# Altium PCB Design1.PcbDoc
Units mm, origin at the board's own origin, x right, y up, seen from the top; angles counter-clockwise.
Board outline 68.6 x 53.4 mm, 2 copper layers (Top Layer, Bottom Layer), stack 1.671 mm thick; 7 components, 14 nets, 82 pads, 0 vias.
Unrouted connection lines stored in the file: 48.
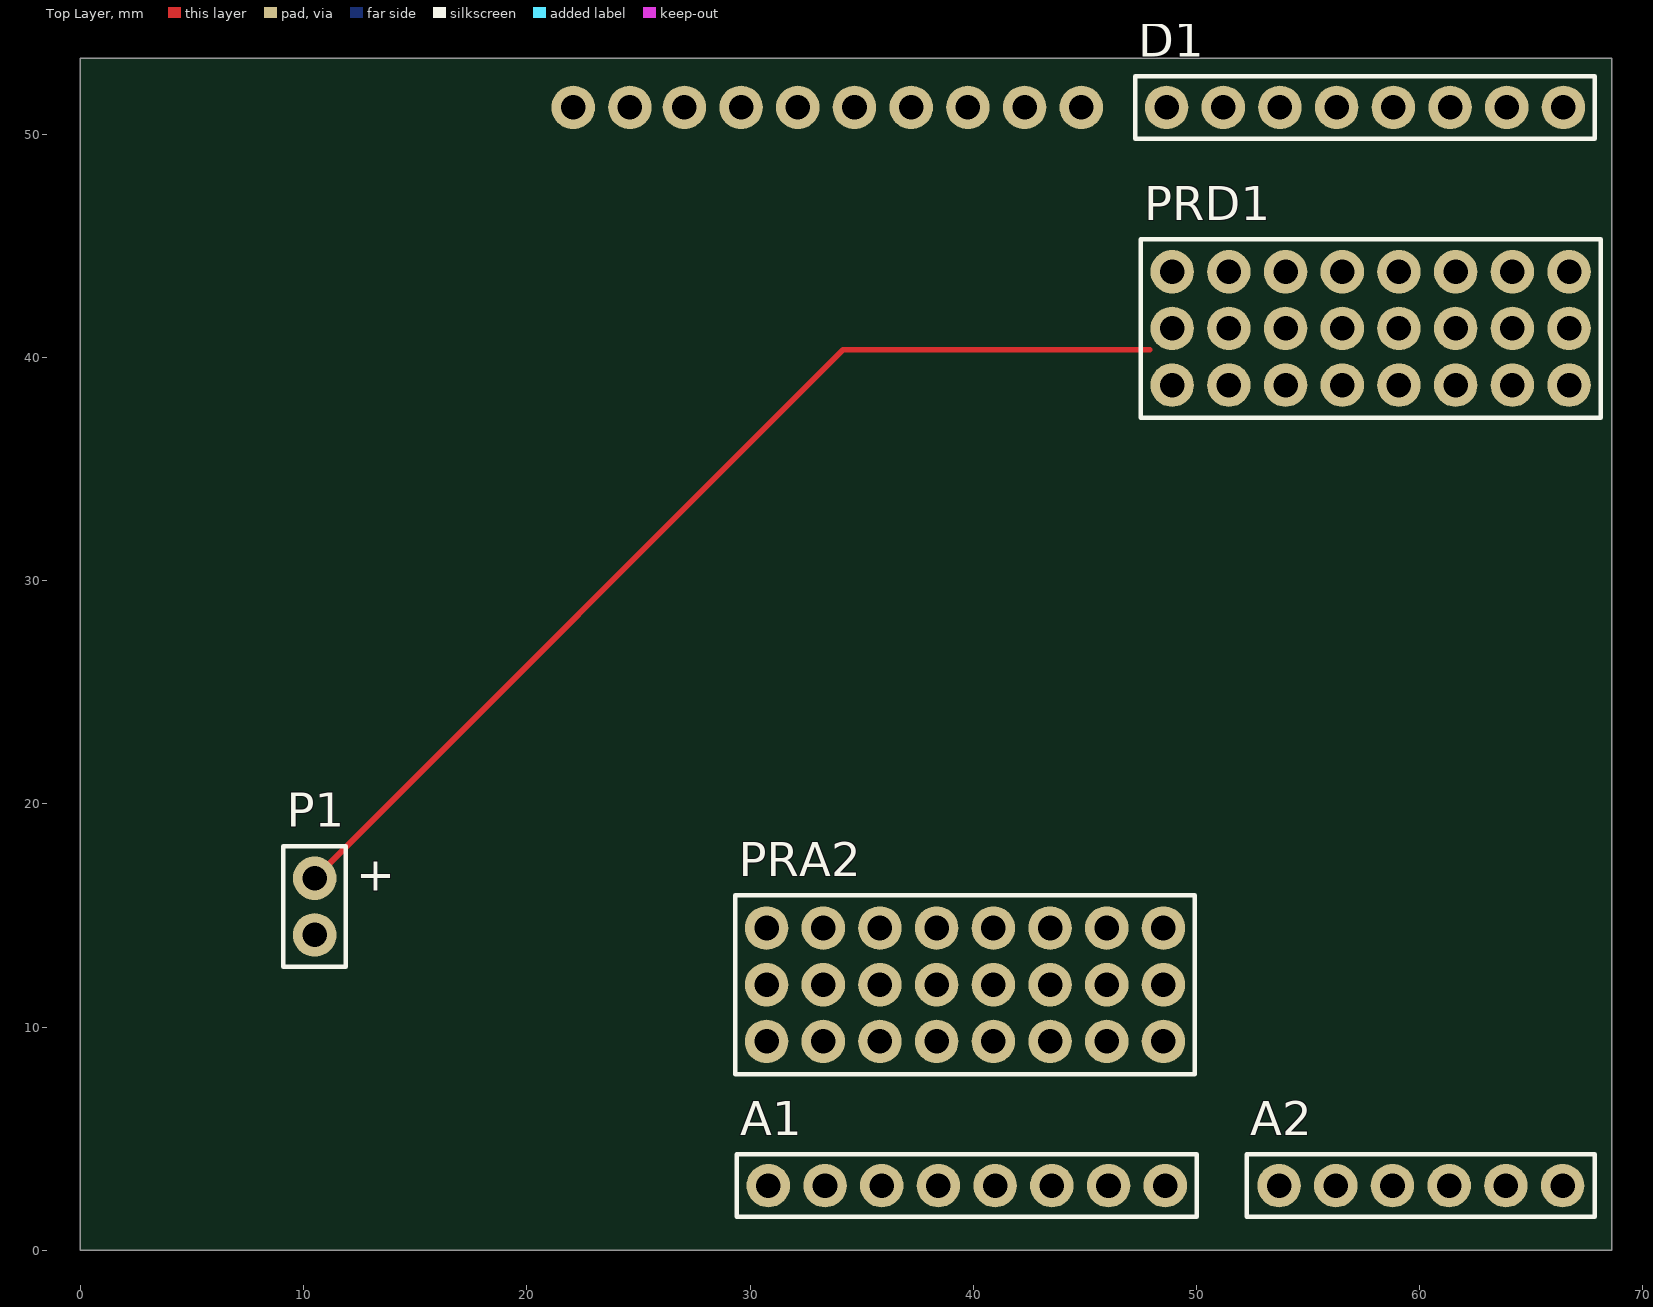
[diagram p0: Top Layer view]
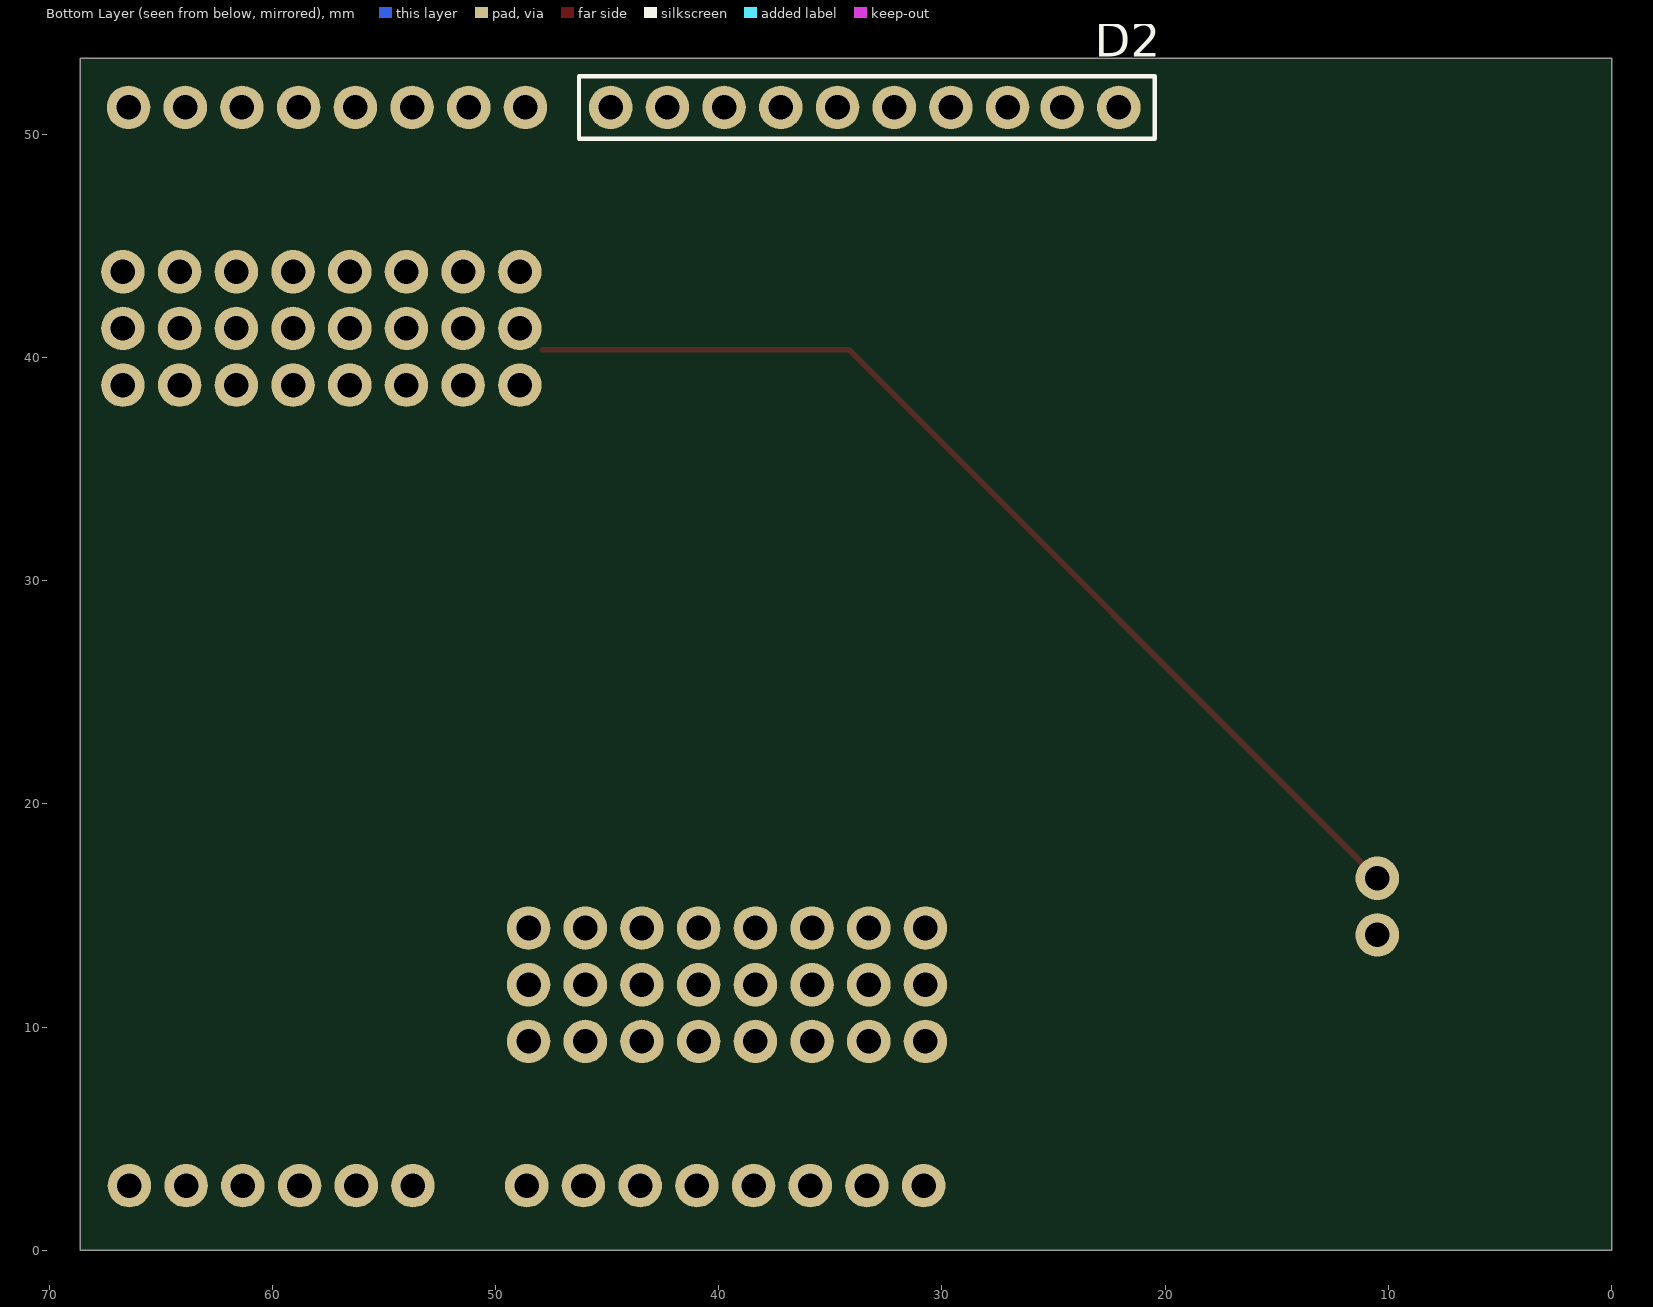
[diagram p1: Bottom Layer view, seen from below]

## Layer stack, top to bottom
Top Solder: solder mask 0.0102, Solder Resist, Dk 3.5
Top Layer: signal copper 0.0356
Dielectric 1: dielectric 1.6, FR-4, Dk 4.8
Bottom Layer: signal copper 0.0356
Bottom Solder: solder mask 0.0102, Solder Resist, Dk 3.5

## Board outline
0,0 68.6,0 68.6,53.4 0,53.4

## Design rules (kind name [scope] priority, off if disabled: settings)
Clearance [All] p1: gap=0.254 ignorepadtopadclearanceinfootprint=FALSE except(0: Arc-Hole Track-Hole SMDPad-Hole THPad-Hole Via-Hole Fill-Hole Poly-Hole Region-Hole Text-Hole)
PolygonConnect [All] p1: connectstyle=Relief reliefconductorwidth=0.254 reliefentries=4 polygonreliefangle="90 Angle" airgapwidth=0.254
RoutingVias [All] p1: holewidth=0.711 width=1.27 viastyle="Through Hole" minholewidth=0.711 minwidth=1.27 maxholewidth=0.711 maxwidth=1.27
SolderMaskExpansion [All] p1: expansion=0.102 istentingtop=FALSE
Width [All] p1: maxlimit=0.254 minlimit=0.254 preferedwidth=0.254
30 further rules are at their usual default settings.

## Components (designator, comment, footprint, x,y, rotation, side; value= is the part's Value field where it differs from the comment)
A1 "1x8 pins" "D0-7 - DUPLICATE1" 39.71,2.9 r90 top
A2 "1x6 pins" "PCBCOMPONENT_1 - DUPLICATE2" 60.05,2.9 r90 top
D1 "1X8 pins" "D0-7 - DUPLICATE1" 57.55,51.2 r270 top
D2 "1x10 pins" ? 33.46,51.2 r90 bottom
P1 "1x2 pins" "PCBCOMPONENT_1 - DUPLICATE" 10.5,15.4 r0 top
PRA2 "Pin row" PCBCOMPONENT_1 39.63,11.9 r90 top
PRD1 "Pin row" PCBCOMPONENT_1 57.8,41.3 r90 top

## Footprints (in the part's own frame and the unit in brackets; to place one, negate y for a bottom-side part, rotate by r counter-clockwise, add the part's x,y. Pads: shape width x height; smd on the part's side, far side on the other; paste and mask are expansions set on the pad)
"D0-7 - DUPLICATE1" [mm]
  round 1.95 hole 1.1: 0(0,8.89) 1(0,6.35) 2(0,3.81) 3(0,1.27) 4(0,-1.27) 5(0,-3.81) 6(0,-6.35) 7(0,-8.89)
  silkscreen extent -1.4,-10.3 1.4,10.3, body extent -1.27,-10.16 1.27,10.16, height 8.54
PCBCOMPONENT_1 [mm]
  round 1.95 hole 1.1: 0(-2.54,8.89) 0(0,8.89) 0(2.54,8.89) 1(-2.54,6.35) 1(0,6.35) 1(2.54,6.35) 2(-2.54,3.81) 2(0,3.81) 2(2.54,3.81) 3(-2.54,1.27) 3(0,1.27) 3(2.54,1.27) 4(-2.54,-1.27) 4(0,-1.27) 4(2.54,-1.27) 5(-2.54,-3.81) 5(0,-3.81) 5(2.54,-3.81) 6(-2.54,-6.35) 6(0,-6.35) 6(2.54,-6.35) 7(-2.54,-8.89) 7(0,-8.89) 7(2.54,-8.89)
  silkscreen extent -4,-10.3 4,10.3, body extent -3.81,-10.16 3.81,10.16, height 8.55
"PCBCOMPONENT_1 - DUPLICATE" [mm]
  round 1.95 hole 1.1: 1(0,1.27) 2(0,-1.27)
  silkscreen extent -1.4,-2.7 1.4,2.7, body extent -1.27,-2.54 1.27,2.54, height 8.55
"PCBCOMPONENT_1 - DUPLICATE2" [mm]
  round 1.95 hole 1.1: 0(0,6.35) 1(0,3.81) 2(0,1.27) 3(0,-1.27) 4(0,-3.81) 5(0,-6.35)
  silkscreen extent -1.4,-7.8 1.4,7.8, body extent -1.27,-7.62 1.27,7.62, height 8.55
? [mm]
  round 1.95 hole 1.1: 8(0,-11.38) 9(0,-8.84) 10(0,-6.4) 11(0,-3.86) 12(0,-1.32) 13(0,1.22) 14(0,3.76) 15(0,6.3) 16(0,8.84) 17(0,11.38)
  silkscreen extent -1.4,-13 1.4,12.8, body extent -1.27,-12.8 1.27,12.6, height 8.55

## Part data
A1: library part "61300811121 (2)", "Board-To-Board Connector, Vertical, Wr-Phd Series, Through Hole, Header, 8, 2.54 Mm", Color=Black, Manufacturer="Wurth Electronics", Manufacturer Part Number=61300811121, Supplier Part Number 1=732-5321-ND, Category=Connectors, ComponentLink1Description=http://www.farnell.com/cad/1737268.pdf?src-supplier=Element14, ComponentLink1URL=http://www.farnell.com/cad/1737268.pdf?src-supplier=Element14, ComponentLink2Description=https://katalog.we-online.de/em/datasheet/6130xx11121.pdf?src-supplier=Digi-Key, ComponentLink2URL=https://katalog.we-online.de/em/datasheet/6130xx11121.pdf?src-supplier=Digi-Key, Connector Type="Male Pin", Contact Material=Copper, Contact Mating Length=0.236inch, Contact Plating=Gold, Gender=Male, Mount="Through Hole", Number of Contacts=8, Number of Positions=8, Number of Rows=1, Packaging=Bulk, Pitch=0.1inch, Pricing 1="1=0.37000, 10=0.31500, 25=0.26320, 50=0.21900, 100=0.19900, 1000=0.18100 (USD)", REACH SVHC=Unknown, RoHS=Yes, RoHS Compliant=Yes, Stock 1=5407, Supplier 1=Digi-Key, Termination=Solder
A2: library part 61300611121, "WURTH ELEKTRONIK - 61300611121 - Pin Header, Board-to-Board, 2.54 mm, 1 Rows, 6 Contacts, Through Hole, WR-PHD Series", Color=Black, Current Rating=3A, Manufacturer="Wurth Electronics", Max Operating Temperature=125°C, Min Operating Temperature=-40°C, Supplier Part Number 1=732-5319-ND, Voltage Rating=250V, Category=Connectors, ComponentLink1Description=http://www.mouser.com/ds/2/445/6130xx11121-538006.pdf?src-supplier=Mouser, ComponentLink1URL=http://www.mouser.com/ds/2/445/6130xx11121-538006.pdf?src-supplier=Mouser, ComponentLink2Description=http://www.farnell.com/cad/1737268.pdf?src-supplier=Element14, ComponentLink2URL=http://www.farnell.com/cad/1737268.pdf?src-supplier=Element14, ComponentLink3Description=https://katalog.we-online.de/em/datasheet/6130xx11121.pdf?src-supplier=Digi-Key, ComponentLink3URL=https://katalog.we-online.de/em/datasheet/6130xx11121.pdf?src-supplier=Digi-Key, Connector Type="Male Pin", Contact Gender=Male, Contact Material="Copper Alloy,Copper", Contact Mating Length=0.236inch, Contact Plating=Gold, Gender=Male, Housing Material=PBT, Lead Free="Lead Free", Manufacturer Part Number=61300611121, Mount="Through Hole", Number of Contacts=6, Number of Positions=6, Number of Rows=1, Packaging=Bulk, Pitch=0.1inch, Pricing 1="1=0.33000, 10=0.27900, 25=0.23200, 50=0.19400, 100=0.17600, 1000=0.16000 (USD)", REACH SVHC=Unknown, RoHS=Yes, Stock 1=43078, Supplier 1=Digi-Key, Termination="Through Hole"
D1: library part 61300811121, "Board-To-Board Connector, Vertical, Wr-Phd Series, Through Hole, Header, 8, 2.54 Mm", Color=Black, Manufacturer="Wurth Electronics", Supplier Part Number 1=732-5321-ND, Category=Connectors, ComponentLink1Description=https://katalog.we-online.de/em/datasheet/6130xx11121.pdf?src-supplier=Digi-Key, ComponentLink1URL=https://katalog.we-online.de/em/datasheet/6130xx11121.pdf?src-supplier=Digi-Key, ComponentLink2Description=http://www.farnell.com/cad/1737268.pdf?src-supplier=Element14, ComponentLink2URL=http://www.farnell.com/cad/1737268.pdf?src-supplier=Element14, Connector Type="Male Pin", Contact Material=Copper, Contact Mating Length=0.236inch, Contact Plating=Gold, Gender=Male, Manufacturer Part Number=61300811121, Mount="Through Hole", Number of Contacts=8, Number of Positions=8, Number of Rows=1, Packaging=Bulk, Pitch=0.1inch, Pricing 1="1=0.37000, 10=0.31500, 25=0.26320, 50=0.21900, 100=0.19900, 1000=0.18100 (USD)", REACH SVHC=Unknown, RoHS=Yes, RoHS Compliant=Yes, Stock 1=5407, Supplier 1=Digi-Key, Termination=Solder
D2: library part 61301011121, "WURTH ELEKTRONIK - 61301011121 - Pin Header, Board-to-Board, 2.54 mm, 1 Rows, 10 Contacts, Through Hole, WR-PHD Series", Color=Black, Current Rating=3A, Flammability Rating="UL94 V-0", Insulation Resistance=1GR, Manufacturer="Wurth Electronics", Max Operating Temperature=125°C, Min Operating Temperature=-40°C, Package Quantity=1000, Supplier Part Number 1=732-2670-ND, Voltage Rating=250V, Category="Headers and Wire Housings", ComponentLink1Description=https://datasheet.ciiva.com/7631/1442175-7631321.pdf?src-supplier=Element14, ComponentLink1URL=https://datasheet.ciiva.com/7631/1442175-7631321.pdf?src-supplier=Element14, ComponentLink2Description=https://datasheet.ciiva.com/738/6130xx11121-738550.pdf?src-supplier=Digi-Key, ComponentLink2URL=https://datasheet.ciiva.com/738/6130xx11121-738550.pdf?src-supplier=Digi-Key, ComponentLink3Description=https://datasheet.ciiva.com/48700/001088187-da-01-en-wr-phd-tht-stiftleiste-61301011121-48700876.pdf?src-supplier=Conrad, ComponentLink3URL=https://datasheet.ciiva.com/48700/001088187-da-01-en-wr-phd-tht-stiftleiste-61301011121-48700876.pdf?src-supplier=Conrad, Connector Type="Male Pin", Contact Gender=Male, Contact Material="Copper Alloy,Copper", Contact Mating Length=0.236inch, Contact Plating=Gold, Contact Type="Male Pin", Gender=Male, Height=11.54mm, Housing Material=PBT, Length=2.54mm, Manufacturer Part Number=61301011121, Mount="Through Hole", Number of Contacts=10, Number of Positions=10, Number of Rows=1, Orientation=Straight, Packaging=Bulk, Pitch=2.54mm, Pricing 1="1=0.89000, 10=0.87400, 50=0.80600, 100=0.73900, 200=0.67200 (USD)", REACH SVHC=Unknown, RoHS=Yes, RoHS Compliant=Yes, Series=WR-PHD, Stock 1=4797, Supplier 1=Digi-Key, Termination=Solder, Width=25.4mm
P1: library part 61300211121, "WURTH ELEKTRONIK - 61300211121 - Pin Header, Vertical, Board-to-Board, 2.54 mm, 1 Rows, 2 Contacts, Through Hole Straight", Color=Black, Current Rating=3A, Manufacturer="Wurth Electronics", Max Operating Temperature=125°C, Min Operating Temperature=-40°C, Supplier Part Number 1=732-5315-ND, Voltage Rating=250V, Category="Headers and Wire Housings", ComponentLink1Description=https://datasheet.ciiva.com/13619/6130xx11121-48870-13619345.pdf?src-supplier=Mouser, ComponentLink1URL=https://datasheet.ciiva.com/13619/6130xx11121-48870-13619345.pdf?src-supplier=Mouser, Connector Type="Male Pin", Contact Gender=Male, Contact Material="Copper Alloy,Copper", Contact Mating Length=0.236inch, Contact Plating=Gold, Gender=Male, Housing Material=PBT, Lead Free="Lead Free", Manufacturer Part Number=61300211121, Mount="Through Hole", Number of Contacts=2, Number of Positions=2, Number of Rows=1, Packaging=Bulk, Pitch=0.1inch, Pricing 1="1=0.13000, 10=0.10600, 25=0.08800, 50=0.07400, 100=0.06700, 1000=0.06100 (USD)", REACH SVHC=Unknown, RoHS=Yes, Stock 1=160304, Supplier 1=Digi-Key, Termination="Through Hole"

## Nets (pads, with @x,y where several pads share a name; then routed paths per layer and width w, separated by ;. In a path a pad name is that pad's centre, name@x,y a point inside that pad or via, vN(x,y) a via of type N, cw(c..) or ccw(c..) an arc to the next point about the centre after c; other vN are vias at no path point)
+5V: 
GND: D2.14 PRA2.0 PRA2.1 PRA2.2 PRA2.3 PRA2.4 PRA2.5 PRA2.6 PRA2.7 PRD1.0 PRD1.1 PRD1.2 PRD1.3 PRD1.4 PRD1.5 PRD1.6 PRD1.7
NetA1_A6: 
NetA1_A8: 
NetA1_A9: 
NetA1_A13: 
NetD1_0: D1.0
NetD1_1: D1.1
NetD1_2: D1.2
NetD1_3: D1.3
NetD1_4: D1.4
NetD1_5: D1.5
NetD1_6: D1.6
NetD1_7: D1.7
pads on no net: A1.0 A1.1 A1.2 A1.3 A1.4 A1.5 A1.6 A1.7 A2.0 A2.1 A2.2 A2.3 A2.4 A2.5 D2.8 D2.9 D2.10 D2.11 D2.12 D2.13 D2.15 D2.16 D2.17 P1.1 P1.2
copper on no net: | length 47.2
  Top Layer w0.254: 10.5,16.67 34.171,40.341 47.9,40.341

## Text inside footprints (layer, text, board x,y; h text height)
P1: Top Overlay "+" at 12.354,16.1 h1.52